# Altium PCB PumpMinder_v2.1.PcbDoc
Units mil, origin at the board's own origin, x right, y up, seen from the top; angles counter-clockwise.
Board outline 1300 x 1250 mil, 2 copper layers (Top Layer, Bottom Layer); 25 components, 18 nets, 124 pads, 17 vias.
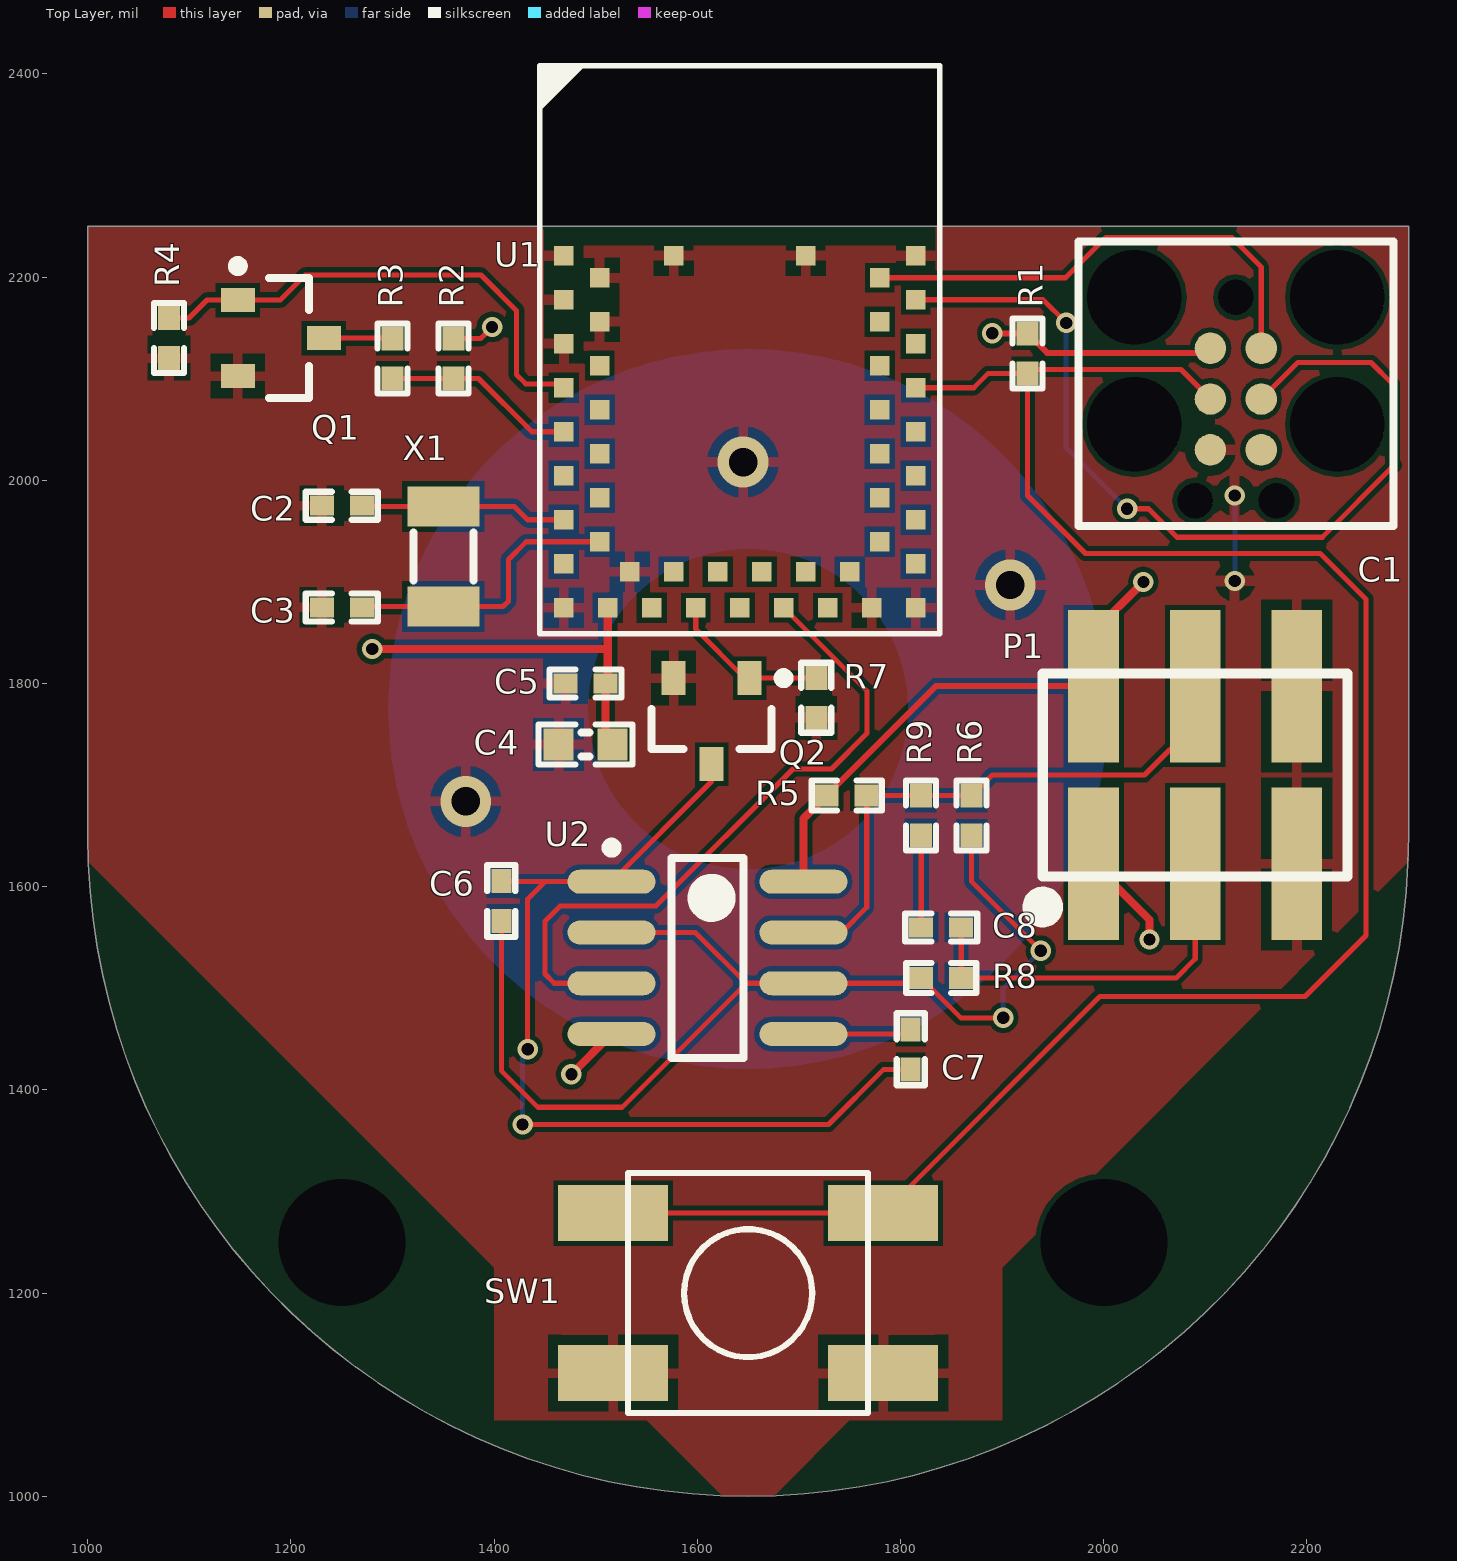
[diagram p0: Top Layer view]
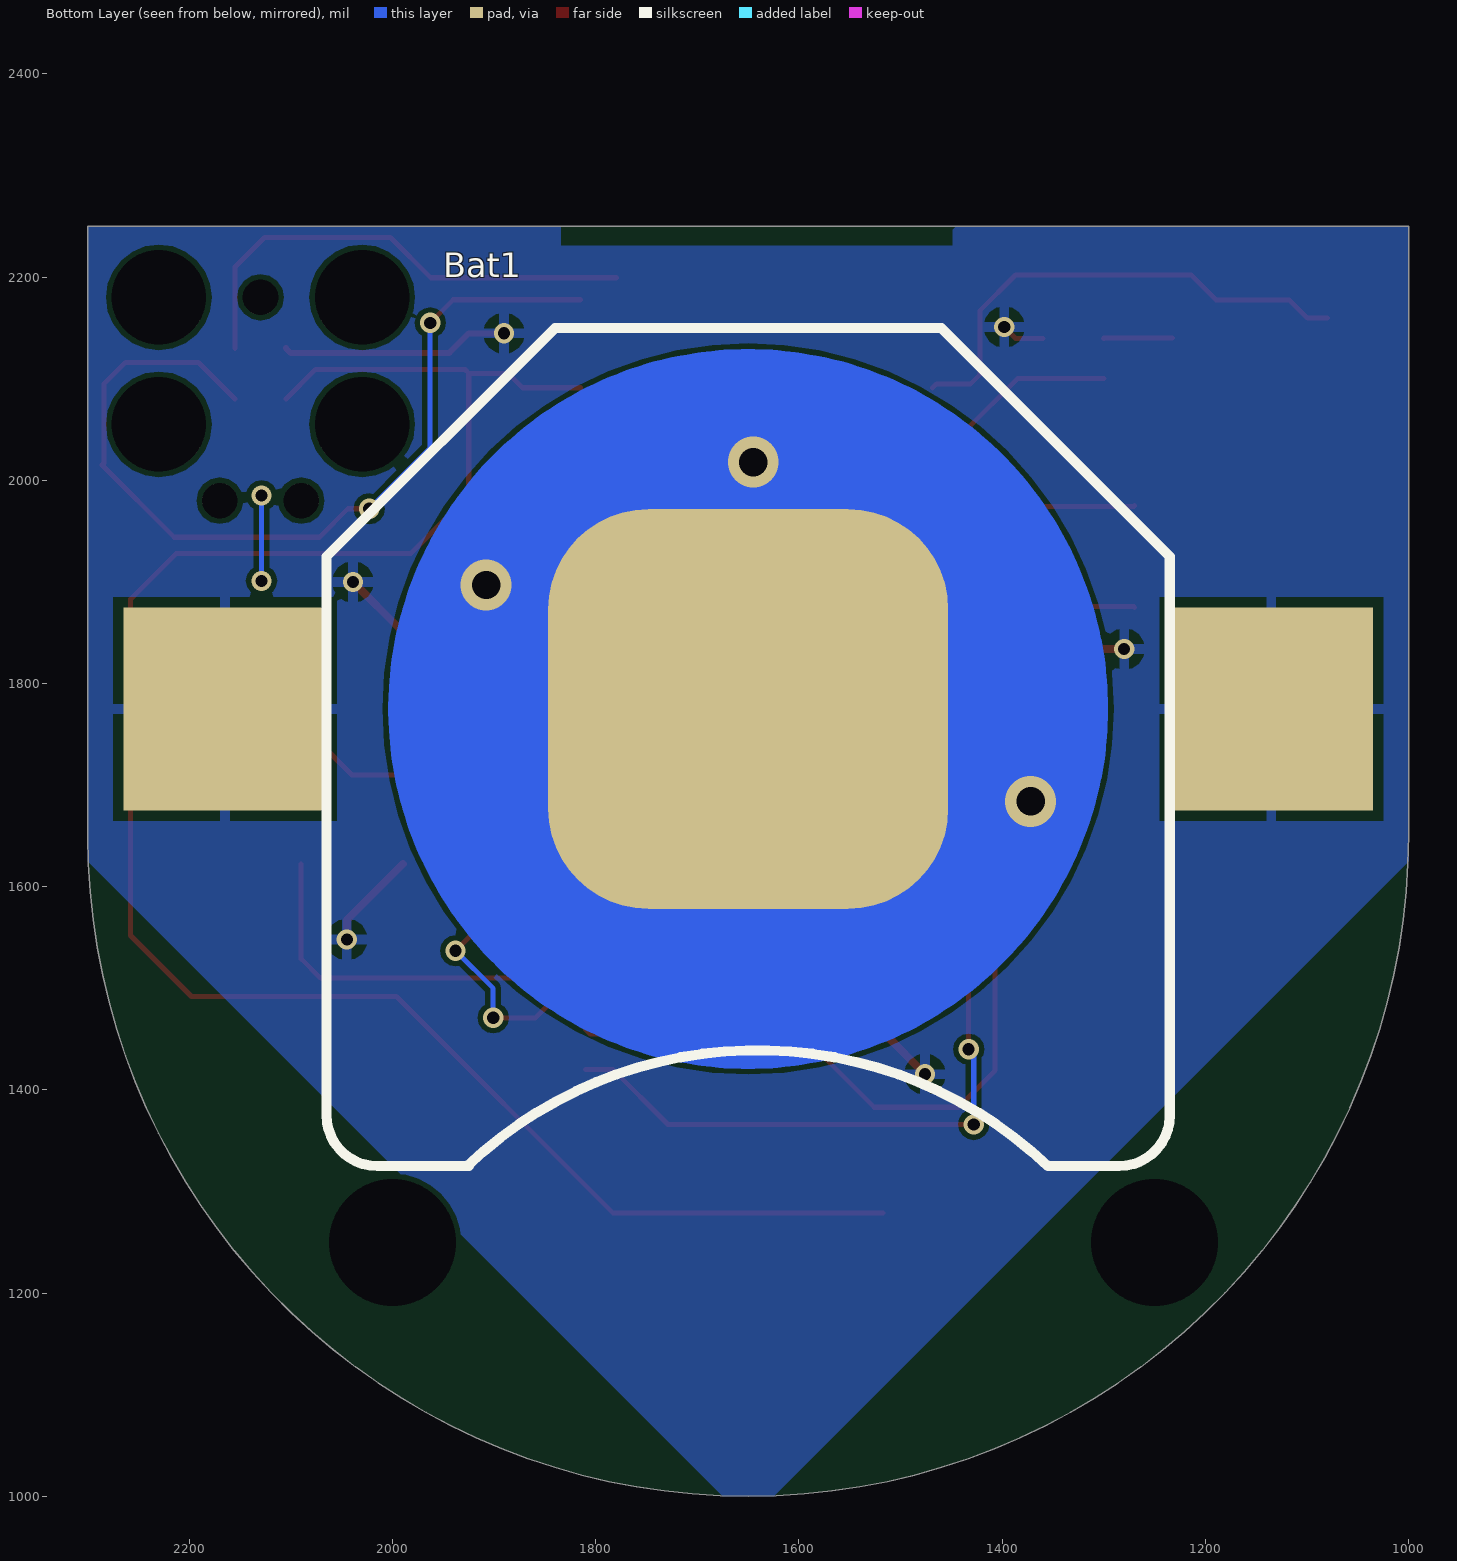
[diagram p1: Bottom Layer view, seen from below]
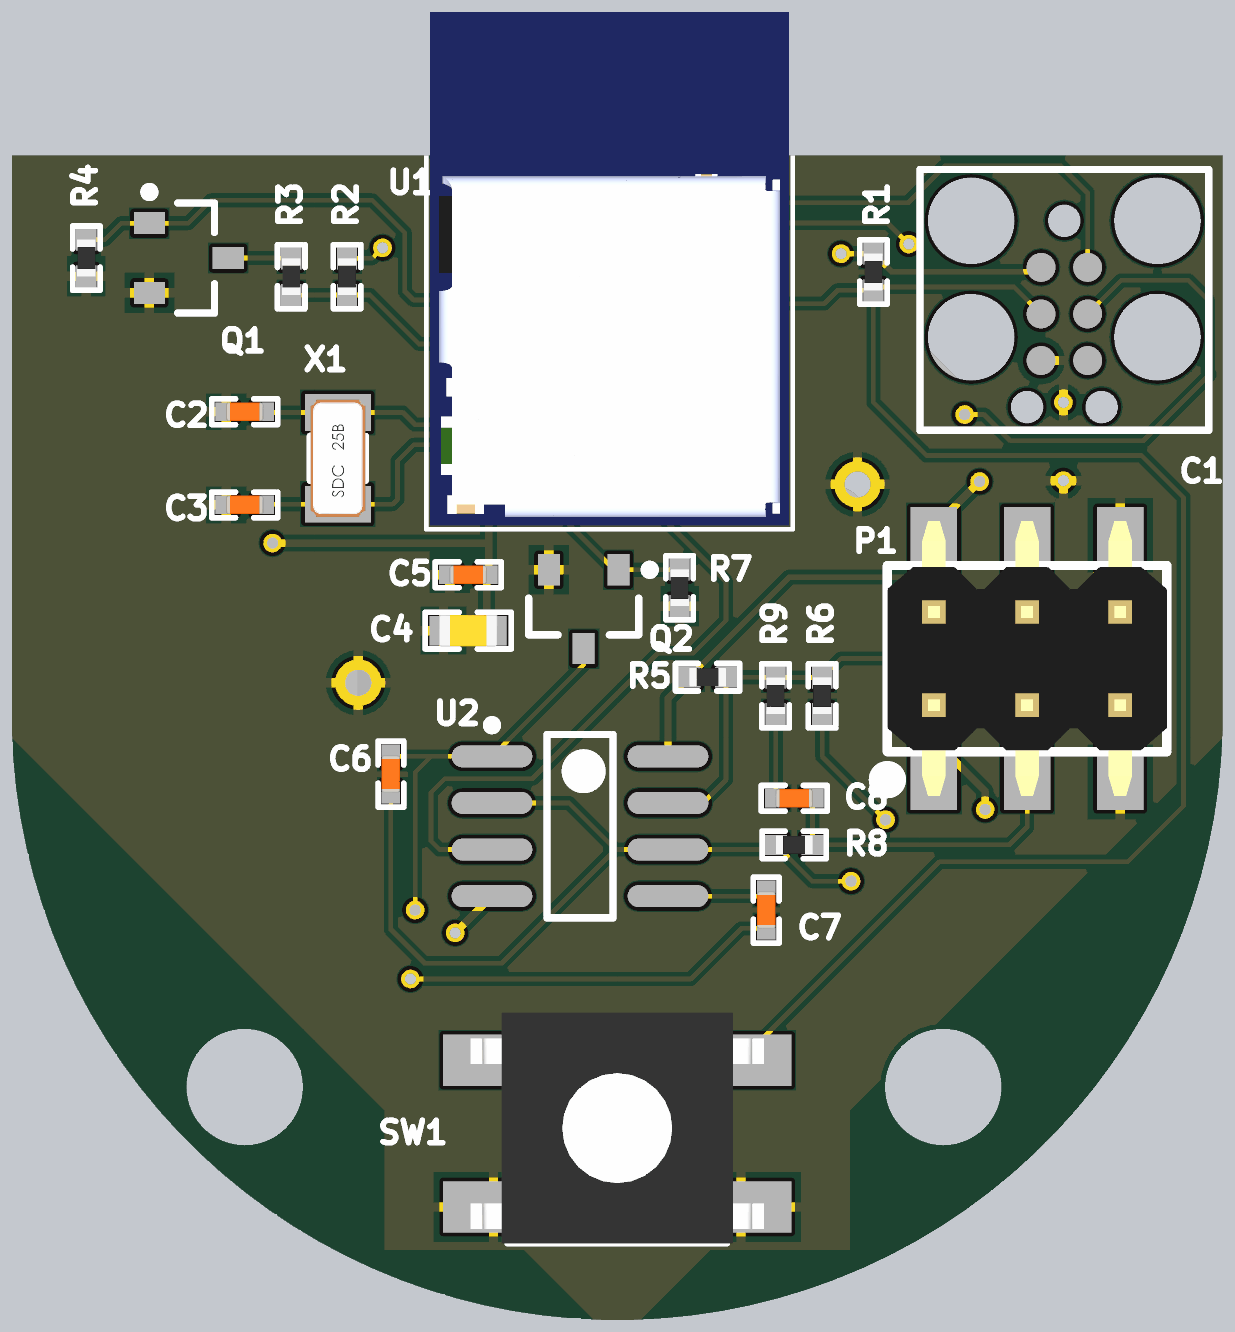
[diagram p2: 3D render of the assembled board from above, using the file's embedded part models]

## Layer stack, top to bottom
Top Layer: signal copper 1.4
Dielectric: dielectric 12.6, FR-4, Dk 4.8
Bottom Layer: signal copper 1.4

## Board outline
1000,1650 1000,2250 2300,2250 2300,1650 cw(c1650,1650)

## Design rules (kind name [scope] priority, off if disabled: settings)
Clearance [All] p1: gap=5
PolygonConnect [All] p1: connectstyle=Relief reliefconductorwidth=10 reliefentries=4 polygonreliefangle="90 Angle" airgapwidth=10
RoutingVias [All] p1: holewidth=12 width=20 viastyle="Through Hole" minholewidth=12 minwidth=20 maxholewidth=28 maxwidth=50
SilkscreenOverComponentPads [All] p1: minsilkscreentomaskgap=10
SolderMaskExpansion [All] p1: expansion=4
Width [All] p1: maxlimit=2000 minlimit=5 preferedwidth=6
27 further rules are at their usual default settings.

## Components (designator, comment, footprint, x,y, rotation, side; value= is the part's Value field where it differs from the comment)
Bat1 "Bat Holder CR2032" CR2032_HOLDER_SMD 1650,1775 r0 bottom
C1 "ICSP" TC2030-MCP 2130,2180 r270 top
C2 "12pF" CAPC1005X04L 1250,1975 r0 top
C3 "12pF" CAPC1005X04L 1250,1875 r0 top
C4 "1.0uF" CAPC1608X06L 1490,1740 r0 top
C5 "100nF" CAPC1005X04L 1490,1800 r0 top
C6 "100nF" CAPC1005X04L 1407,1586 r90 top
C7 "10nF" CAPC1005X04L 1810,1440 r270 top
C8 "10nF" CAPC1005X04L 1840,1560 r180 top
P1 "Pin Hdr 2x3" "Molex 15-91-2060" 2090,1710 r0 top
Q1 "MOSFET-N" SOT-23_L 1190,2140 r0 top
Q2 "MOSFET-N" SOT-23_L 1614,1763 r270 top
R1 "1k" RESC1005X04L 1925,2125 r90 top
R2 "1k" RESC1005X04L 1360,2120 r270 top
R3 "1k" RESC1005X04L 1300,2120 r90 top
R4 "100k" RESC1005X04L 1080,2140 r270 top
R5 "300" RESC1005X04L 1747,1690 r180 top
R6 "100k" RESC1005X04L 1870,1670 r90 top
R7 "100k" RESC1005X04L 1717,1786 r270 top
R8 "100" RESC1005X04L 1840,1510 r180 top
R9 "100" RESC1005X04L 1820,1670 r270 top
SW1 "PB SW" ALPS_SKHUxxx010_WO_GND 1650,1200 r0 top
U1 "BMD-300" BMD-300 1750,1910 r270 top
U2 "ICM7555CBAX-T" SOIC127P600X175-8N 1610,1530 r0 top
X1 "32.768kHz" XTAL_3215 1350,1925 r90 top

## Footprints (in the part's own frame and the unit in brackets; to place one, negate y for a bottom-side part, rotate by r counter-clockwise, add the part's x,y. Pads: shape width x height; smd on the part's side, far side on the other; paste and mask are expansions set on the pad)
ALPS_SKHUxxx010_WO_GND [mm]
  rect 2.75x1.4 smd: 1(-3.375,2) 1(3.375,2) 2(-3.375,-2) 2(3.375,-2)
  silkscreen extent -3,-3 3,3, body extent -4,-3 4,3.3, height 3.1
BMD-300 [mm] "BMD-300, LGA, 47pin ,1.1mm Pitch, 14mm x 9.8mm"
  rect 0.49x0.49 smd: 1(-7.9,-7.15) 2(-7.35,-6.25) 3(-6.8,-7.15) 4(-6.25,-6.25) 5(-5.7,-7.15) 6(-5.15,-6.25) 7(-4.6,-7.15) 8(-4.05,-6.25) 9(-3.5,-7.15) 10(-2.95,-6.25) 11(-2.4,-7.15) 12(-1.85,-6.25) 13(-1.3,-7.15) 14(-0.75,-6.25) 15(-0.2,-7.15) 16(0.9,-7.15) 17(0.9,-6.05) 18(0,-5.5) 19(0.9,-4.95) 20(0,-4.4) 21(0.9,-3.85) 22(0,-3.3) 23(0.9,-2.75) 24(0,-2.2) 25(0.9,-1.65) 26(0,-1.1) 27(0.9,-0.55) 28(0,0) 29(0.9,0.55) 30(0.9,1.65) 31(-0.2,1.65) 32(-0.75,0.75) 33(-1.3,1.65) 34(-1.85,0.75) 35(-2.4,1.65) 36(-2.95,0.75) 37(-3.5,1.65) 38(-4.05,0.75) 39(-4.6,1.65) 40(-5.15,0.75) 41(-5.7,1.65) 42(-6.25,0.75) 43(-6.8,1.65) 44(-7.35,0.75) 45(-7.9,1.65) 46(-7.9,-1.1) 47(-7.9,-4.4)
  Multi-Layer pour cut-out: -8.15,-7.65 -8.15,2.15 -12.55,2.15 -12.55,-7.65
  silkscreen extent -12.65,-7.75 1.55,2.25, body extent -12.55,-7.65 1.45,2.15, height 1.89
CAPC1005X04L [mm]
  rect 0.6x0.5 smd: 1(-0.5,0) 2(0.5,0)
  silkscreen extent -0.9,-0.35 0.9,0.35, body extent -0.51,-0.25 0.51,0.25, height 0.5
CAPC1608X06L [mm]
  rect 0.75x0.8 smd: 1(-0.675,0) 2(0.675,0)
  silkscreen extent -1.17,-0.5 1.17,0.5, body extent -0.8,-0.43 0.8,0.43, height 0.8
CR2032_HOLDER_SMD [mm]
  round 18 on Bottom Solder paste+0: 0(0,0)
  rect 5.08x5.08 smd: 1(-13.081,0) 1(13.081,0)
  rrect50% 10x10 smd paste-9: 2(0,0)
  Top Layer circle w5: c0,0 r6.5
  silkscreen extent -10.54,-9.53 10.54,11.43, body extent -15.37,-10.27 15.37,9.78, height 3.96
"Molex 15-91-2060" [mil]
  rect 50x150 smd: 1(-100,-87.5) 2(-100,87.5) 3(0,-87.5) 4(0,87.5) 5(100,-87.5) 6(100,87.5)
  silkscreen extent -160,-140 150,100, body extent -150,-148 150,148, height 382
RESC1005X04L [mm]
  rect 0.6x0.55 smd: 1(-0.5,0) 2(0.5,0)
  silkscreen extent -0.87,-0.38 0.88,0.38, body extent -0.5,-0.25 0.5,0.25, height 0.3
SOIC127P600X175-8N [mm] "SOIC, 8-Leads, Body 5.0x4.0mm (max), Pitch 1.27mm, IPC Medium Density"
  oval 2.2x0.6 smd: 1(-2.4,1.905) 2(-2.4,0.635) 3(-2.4,-0.635) 4(-2.4,-1.905) 5(2.4,-1.905) 6(2.4,-0.635) 7(2.4,0.635) 8(2.4,1.905)
  silkscreen extent -2.52,-2.5 0.9,2.88, body extent -2,-2.5 2,2.5, height 1.75
SOT-23_L [mm] "SOT23, 3-Leads, Body 2.9x1.3mm, Pitch 0.95mm, Lead Span 2.5mm, IPC High Density"
  rect 0.85x0.6 smd: 1(-1.075,0.95) 2(-1.075,-0.95) 3(1.075,0)
  silkscreen extent -1.2,-1.5 0.7,1.92, body extent -0.7,-1.5 0.7,1.5, height 1.1
TC2030-MCP [mil]
  round 31 smd: 1(50,-25) 2(50,25) 3(100,-25) 4(100,25) 5(150,-25) 6(150,25)
  round 34 hole 35 unplated: A(0,0) B(200,40) C(200,-40)
  round 92 hole 93 unplated: D(0,-100) E(125,-100) F(0,100) G(125,100)
  silkscreen extent -55,-155 225,155
XTAL_3215 [mm]
  rect 1x1.8 smd: 1(-1.25,0) 2(1.25,0)
  silkscreen extent -0.6,-0.75 0.6,0.75, body extent -1.6,-0.75 1.6,0.75, height 0.81

## Part data
Bat1: library part Battery, "Bat Holder CR2032 SMD"
C2 C3 C5 C6 C7 C8: library part CAP_0402, "Capacitor, NP0, ±0.1pF"
C4: library part CAP_0603, "Capacitor, X5R, ±10%"
P1: library part "Pin Header 2x3 SMD", "Pin Header 2x3, 2.54mm (100mil) SMD"
Q1 Q2: "N-Channel MOSFET"
R1 R2 R3 R4 R5 R6 R7 R8 R9: library part RES_0402, "Not mounted"
SW1: library part SW-PB, "ALPS - SKHUALE010 - Tactile Switch, SPNO, SMD, 6.5x6.2x2.5mm"
U1: library part BMD-300-A, "Bluetooth 4.2 LE Module, nRF52832, 512kB Flash, 64kB RAM"
U2: library part "555 Timer"
X1: library part XTAL_SMD3215, "EPSON TOYOCOM - FC-135 32.768KHZ ±20PPM,9.0PF - CRYSTAL, SM, WATCH"

## Free pads (board coordinates)
  round 50 hole 125 unplated paste+0 mask+0: 0(1250,1250)
  round 60 hole 125 unplated mask+0: 1(2000,1250)

## Via types
v1: diameter 20, hole 12, Top Layer to Bottom Layer, 14 vias
v2: diameter 50, hole 28, Top Layer to Bottom Layer, 3 vias

## Nets (pads, with @x,y where several pads share a name; then routed paths per layer and width w, separated by ;. In a path a pad name is that pad's centre, name@x,y a point inside that pad or via, vN(x,y) a via of type N, cw(c..) or ccw(c..) an arc to the next point about the centre after c; other vN are vias at no path point)
BATT_CONT: Q1.1 R4.1 U1.7 | length 488.9
  Top Layer w5: R4.1 1099.68,2159.68 1117.4,2177.4 Q1.1 1189.4,2177.4 1214,2202 1387,2202 1422,2167 1422,2104 1431,2095 1464.61,2095 U1.7
BATT_SENSE: R2.2 R3.1 U1.9 | length 190.3
  Top Layer w5: R3.1 R2.2 1384.69,2100.31 1437.2,2047.8 U1.9
GND: Bat1.2 C1.5 C2.1 C3.1 C4.1 C5.1 P1.5 P1.6 Q1.2 Q2.2 R4.2 R7.2 SW1.2 U1.1 U1.2 U1.3 U1.4 U1.5 U1.16 U1.18 U1.29 U1.30 U1.45 U1.46 U1.47 | length 84
  Bottom Layer w5: v1(2129,1901) v1(2129,1985)
  other v2: 1372,1684 1908,1897 1645,2018
NetC7_1: C7.1 U2.5 | length 107.5
  Top Layer w5: U2.5 1805.32,1455 C7.1
NetC8_2: C8.2 R9.2 | length 90.4
  Top Layer w5: R9.2 1820.31,1650 C8.2
NetQ1_1: Q1.3 R3.2 | length 67.8
  Top Layer w5: Q1.3 1299.69,2140 R3.2
NRESET: C1.3 R1.1 SW1.1 U1.39 | length 1990.1
  Top Layer w5: SW1.1@1517.13,1278.74 1782.87,1278.74 1996.13,1492 2198,1492 2258,1552 2258,1883 2213,1928 1982,1928 1925,1985 R1.1 ; U1.39 1872.1,2091.1 1886.32,2105.32 R1.1 ; C1.3 2076,2109 1928.68,2109 R1.1
PROBE_A: C8.1 P1.3 R8.1 | length 381.7
  Top Layer w5: C8.1 R8.1 2071,1510 2090,1529 P1.3
PROBE_B: P1.4 R5.1 R6.2 R9.1 U2.7 | length 572.7
  Top Layer w5: U2.7 1742,1555 1766.68,1579.68 R5.1 R9.1@1820,1690 ; R9.1 R6.2 1890.31,1710 2040,1710 2090,1760 P1.4
SWCLK: C1.4 U1.43 | length 902.7
  Top Layer w5: U1.43 1940.28,2177.72 v1(1963,2155) ; v1(2023,1972) 2044,1972 2072,1944 2215,1944 2286,2015 2284,2017 2284,2095 2263,2116 2191,2116 C1.4
  Bottom Layer w5: v1(1963,2155) 1963,2032 v1(2023,1972)
SWDIO: C1.2 U1.44 | length 483.9
  Top Layer w5: U1.44 1962.37,2199.37 2002,2239 2126,2239 2155,2210 C1.2
TRIGGER: C6.1 R6.1 R8.2 U2.2 U2.6 | length 1101
  Top Layer w5: C6.1 1407,1419 1443,1383 1526,1383 1648,1505 ; U2.2 1598,1555 1648,1505 ; R6.1 1870,1605 v1(1938,1537) ; v1(1901,1471) 1859.31,1471 R8.2 1815.31,1505 U2.6 1648,1505
  Bottom Layer w5: v1(1901,1471) 1901,1500 v1(1938,1537)
VCC: Bat1.1 C1.1 C4.2 C5.2 P1.1 P1.2 R1.2 R2.1 R5.2 U1.17 U2.4 U2.8 | length 1314.9
  Top Layer w5: R2.1 1386.68,2139.68 v1(1398,2151)
  Top Layer w6: R5.2 1834.81,1797.5 P1.2 ; v1(1890.31,2144.69) R1.2 1944.19,2125.5 2100.5,2125.5 C1.1
  Top Layer w8: v1(1280,1834) 1511.81,1834 ; v1(1476,1415.49) U2.4 ; U1.17 1511.81,1834 ; C4.2 1509.69,1746.89 C5.2 1511.81,1802.13 1511.81,1834 ; U2.8 1704.49,1667.17 R5.2 ; P1.1 2045,1567.5 v1(2045,1548) ; P1.2 1990,1851 v1(2039,1900)
WPS_CONT: Q2.1 R7.1 U1.21 | length 159.7
  Top Layer w5: U1.21 1598.43,1853.57 1646.68,1805.32 Q2.1 1716.64,1805.32 R7.1
WPS_GND: C6.2 C7.2 Q2.3 U2.1 | length 917.9
  Top Layer w5: C6.2 1407.69,1605 1450,1605 ; v1(1428,1366) 1729,1366 1783.31,1420.31 C7.2 ; v1(1433,1440) 1433,1588 1450,1605 ; Q2.3 1614,1703.49 U2.1 1450,1605
  Bottom Layer w5: v1(1428,1366) 1428,1435 v1(1433,1440)
WPS_SENSE: U1.25 U2.3 | length 672.2
  Top Layer w5: U2.3 1459,1505 1450,1514 1450,1566 1465,1581 1559,1581 1694,1716 1732,1716 1766.83,1750.83 1766.83,1792.78 U1.25
XTAL+: C2.2 U1.13 X1.2 | length 204.5
  Top Layer w5: C2.2 1270.47,1974.21 X1.2 1419.79,1974.21 1432.82,1961.18 U1.13
XTAL-: C3.2 U1.14 X1.1 | length 285
  Top Layer w5: C3.2 1270.47,1875.79 X1.1 1408.79,1875.79 1414,1881 1414,1922 1431.53,1939.53 U1.14
pads on no net: Bat1.0 C1.6 C1.A C1.B C1.C C1.D C1.E C1.F C1.G U1.6 U1.8 U1.10 U1.11 U1.12 U1.15 U1.19 U1.20 U1.22 U1.23 U1.24 U1.26 U1.27 U1.28 U1.31 U1.32 U1.33 U1.34 U1.35 U1.36 U1.37 U1.38 U1.40 U1.41 U1.42

## Polygon pours and split planes (outlines as drawn)
VCC on Bottom Layer "Btm-Vcc" (solid, pour order 10): 1000,2250 1000,1675 1000,1625 1625,1000 1675,1000 2300,1625 2300,2250
GND on Top Layer "Top-Gnd" (solid, pour order 12): 1000,2250 1000,1625 1625,1000 1675,1000 2300,1625 2300,2250
GND on Top Layer "Top-Gnd2" (solid, pour order 16): 1400,1075 1400,1225 1900,1225 1900,1075

## Silkscreen, mask and mechanical layers (free items; w line width, h text height)
Mechanical 2:
  the board outline again, w10